# Altium PCB PCB2.PcbDoc
Units mil, origin at the board's own origin, x right, y up, seen from the top; angles counter-clockwise.
Board outline 2930 x 1820 mil, 2 copper layers (Top Layer, Bottom Layer), stack 61.756 mil thick; 17 components, 22 nets, 100 pads, 37 vias.
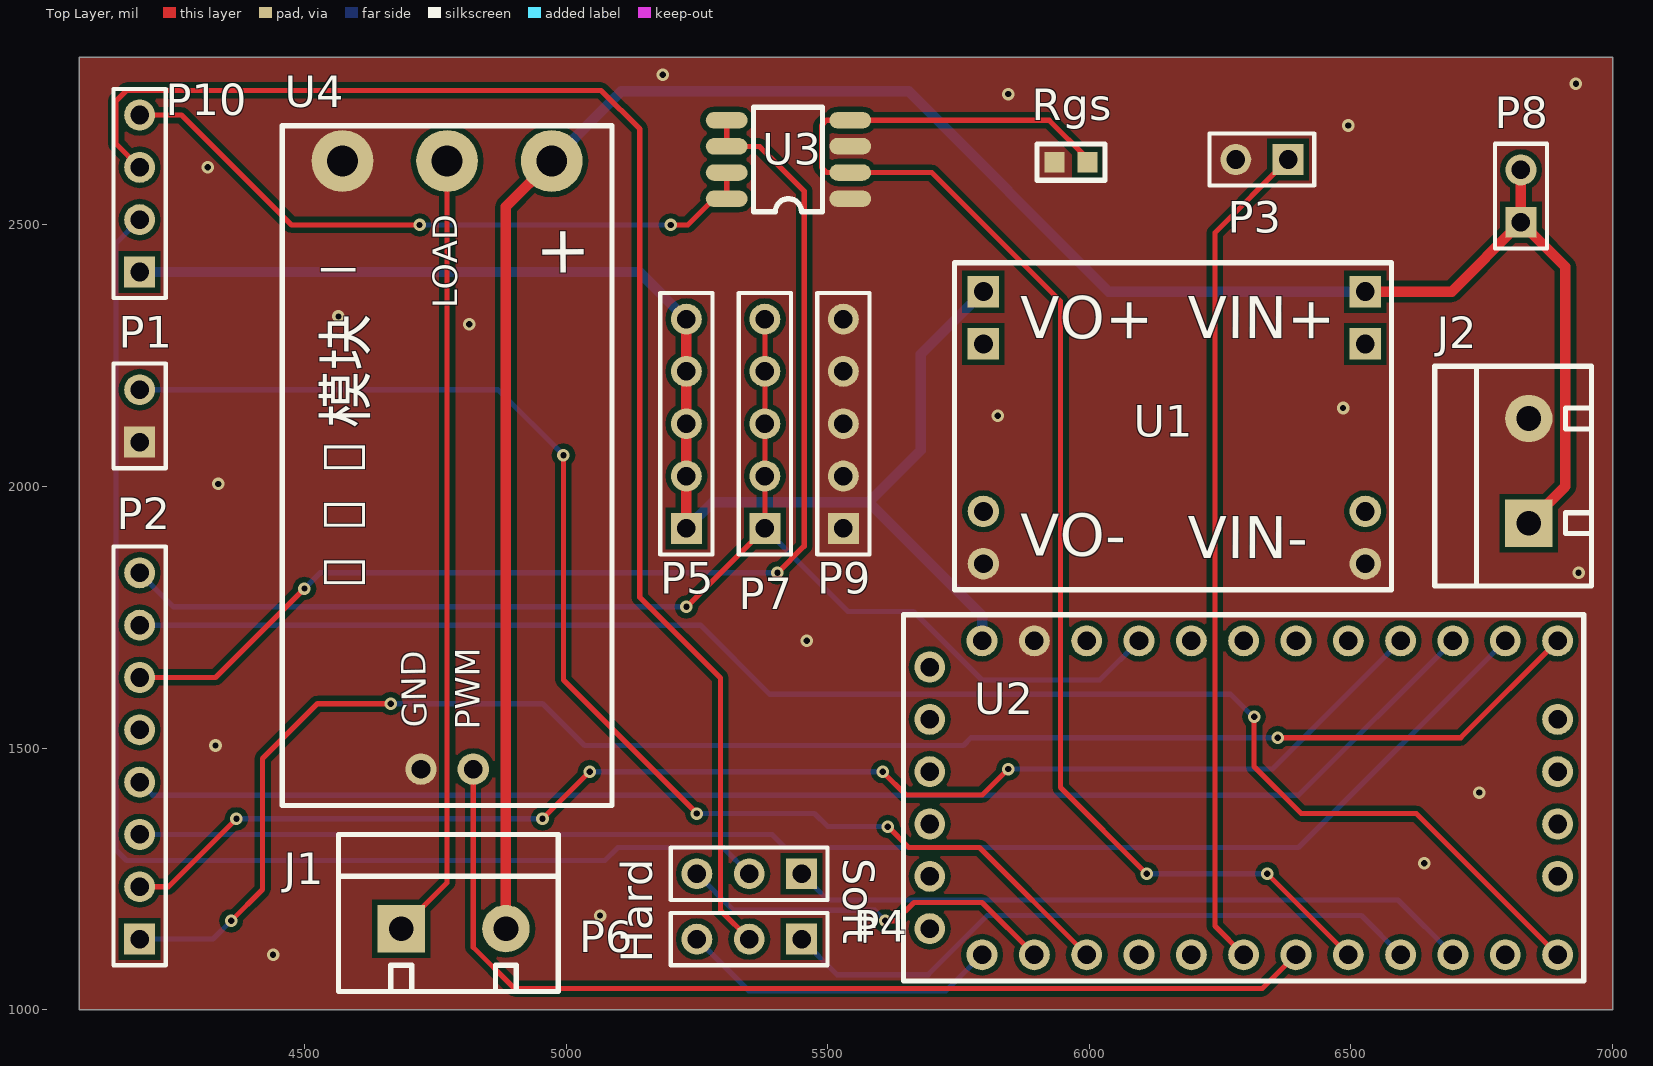
[diagram p0: Top Layer view]
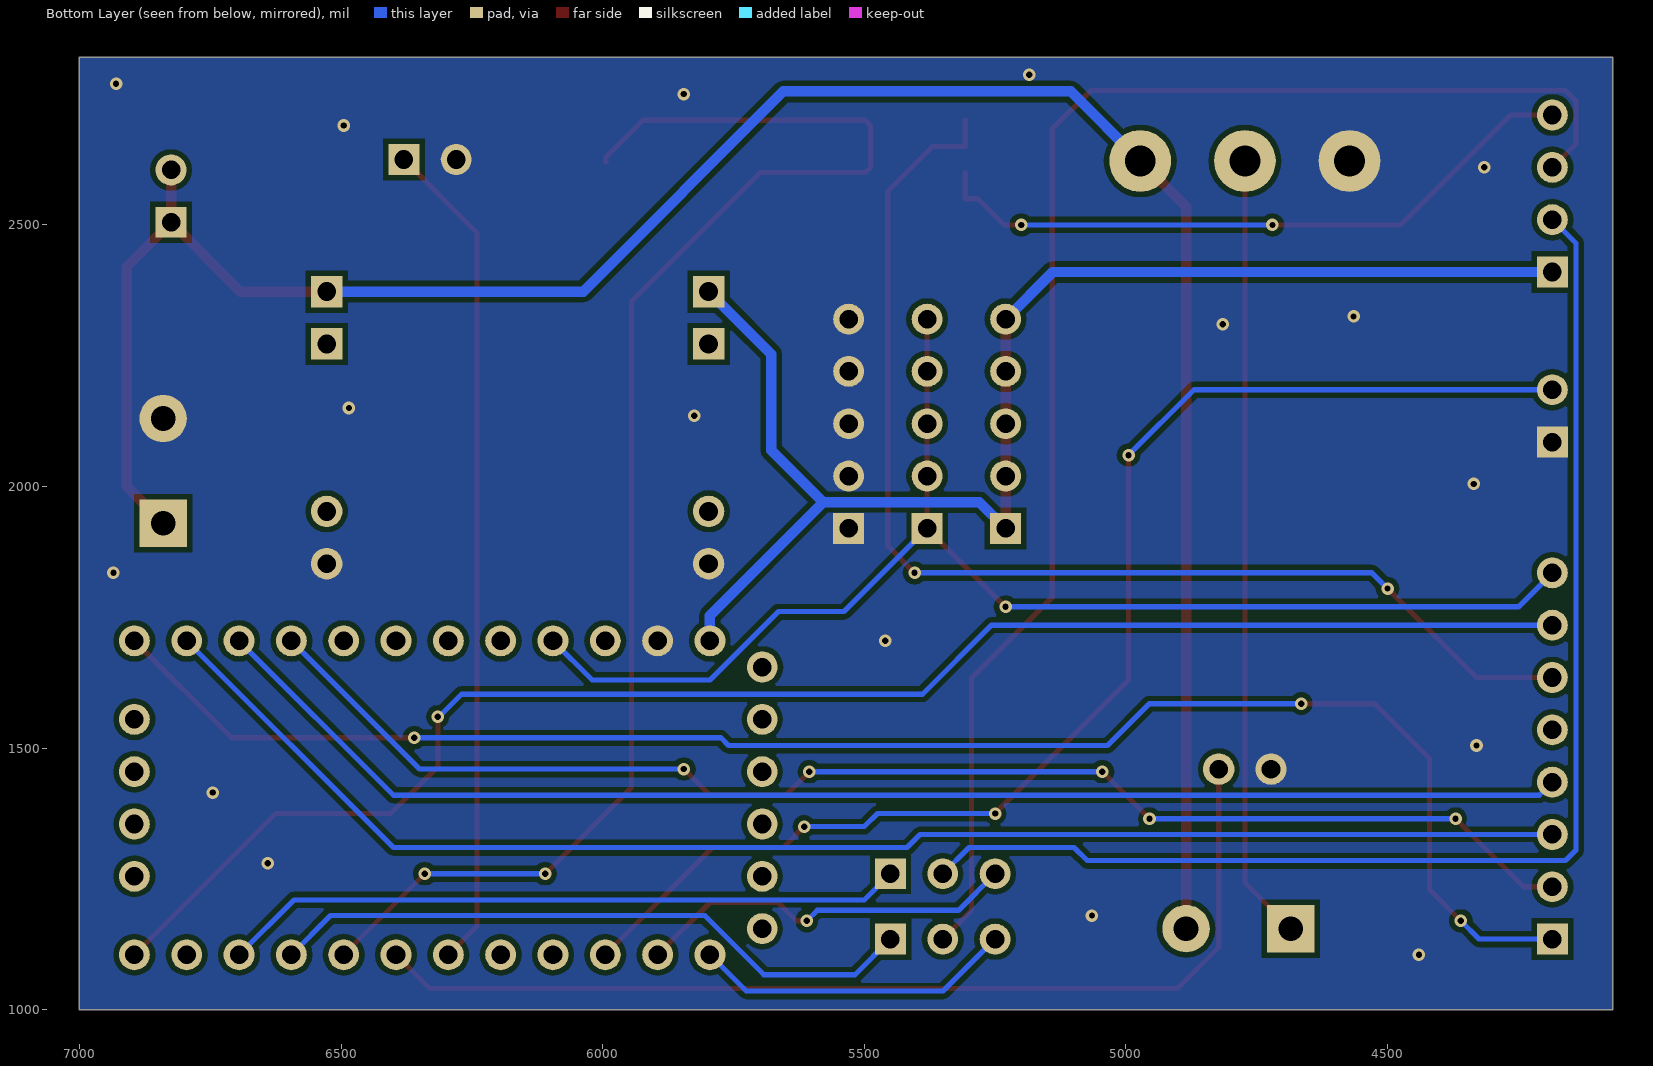
[diagram p1: Bottom Layer view, seen from below]

## Layer stack, top to bottom
Top Solder: solder mask 1, SM-001, Dk 4
Top Layer: signal copper 1.378
Dielectric 1: core 59, Core-043, Dk 4.3
Bottom Layer: signal copper 1.378
Bottom Solder: solder mask 1, SM-001, Dk 4

## Board outline
4070,1000 4070,2820 7000,2820 7000,1000

## Design rules (kind name [scope] priority, off if disabled: settings)
Clearance [All] p1: gap=10 ignorepadtopadclearanceinfootprint=FALSE
PolygonConnect [All] p1: connectstyle=Direct reliefconductorwidth=10 reliefentries=4 polygonreliefangle="90 Angle" airgapwidth=10
RoutingVias [All] p1: holewidth=12 width=24 viastyle="Through Hole" minholewidth=1 minwidth=12 maxholewidth=13 maxwidth=27
SolderMaskExpansion [All] p1: expansion=4 istentingtop=FALSE
Width Width_1 [(InNet('12v') OR InNet('5v') OR InNet('NetP9_1'))] p1: maxlimit=22 minlimit=15 preferedwidth=20 minimp=50.000000 maximp=50.000000 favimp=50.000000
Width [All] p2: maxlimit=10 minlimit=10 preferedwidth=10
30 further rules are at their usual default settings.

## Components (designator, comment, footprint, x,y, rotation, side; value= is the part's Value field where it differs from the comment)
J1 "" KF301-5.0-2P 4775,1185 r0 top
J2 "" KF301-5.0-2P 6810,2020 r90 top
P1 "reset" HDR1X2 4185,2085 r90 top
P2 "Header RFID" HDR1X8 4185,1135 r90 top
P3 "open button" HDR1X2 6380,2625 r180 top
P4 "Header TXQR" HDR1X3 5450,1135 r180 top
P5 "Header 5v" HDR1X5 5230,1920 r90 top
P6 "Header RXQR" HDR1X3 5450,1260 r180 top
P7 "Header 3v3" HDR1X5 5380,1920 r90 top
P8 "Header 12v" HDR1X2 6825,2505 r90 top
P9 "Header GND" HDR1X5 5530,1920 r90 top
P10 "Header QR" HDR1X4 4185,2410 r90 top
Rgs "RES" 0603 5965,2620 r0 top (schematic designator R1)
U1 "" MP1584EN_3A 6160,2115 r180 top
U2 "" ARDUINO-LGT8F-328D_AS_PRO_MINI-PRO-2 6295,1405 r90 top
U3 "" IC-MOS-9926A-SOP8 5425,2625 r180 top
U4 "" "PCBComponent_1 - duplicate" 4785,2040 r90 top

## Footprints (in the part's own frame and the unit in brackets; to place one, negate y for a bottom-side part, rotate by r counter-clockwise, add the part's x,y. Pads: shape width x height; smd on the part's side, far side on the other; paste and mask are expansions set on the pad)
0603 [mm] "SMD, 0603"
  rect 0.95x1 smd: 1(-0.8,0) 2(0.8,0)
  silkscreen extent -1.66,-0.88 1.66,0.88, body extent -0.77,-0.43 0.77,0.43, height 0.45
ARDUINO-LGT8F-328D_AS_PRO_MINI-PRO-2 [mm]
  round 1.5 hole 0.9: 1(-7.62,12.7) 2(-7.62,10.16) 3(-7.62,7.62) 4(-7.62,5.08) 5(-7.62,2.54) 6(-7.62,0) 7(-7.62,-2.54) 8(-7.62,-5.08) 9(-7.62,-7.62) 10(-7.62,-10.16) 11(-7.62,-12.7) 12(-7.62,-15.24) 13(7.62,-15.24) 14(7.62,-12.7) 15(7.62,-10.16) 16(7.62,-7.62) 17(7.62,-5.08) 18(7.62,-2.54) 19(7.62,0) 20(7.62,2.54) 21(7.62,5.08) 22(7.62,7.62) 23(7.62,10.16) 24(7.62,12.7) 25(6.35,15.24) 26(3.81,15.24) 27(1.27,15.24) 28(-1.27,15.24) 29(-3.81,15.24) 30(-6.35,15.24) 31(-3.81,-15.24) 32(-1.27,-15.24) 33(1.27,-15.24) 34(3.81,-15.24)
  silkscreen extent -8.89,-16.51 8.89,16.51
HDR1X2 [mm] "Connector; Header; 2 Position"
  rect 1.5x1.5 hole 0.9: 1(0,0)
  round 1.5 hole 0.9: 2(2.54,0)
  silkscreen extent -1.27,-1.27 3.81,1.27
HDR1X3 [mm] "Connector; Header; 3 Position"
  rect 1.5x1.5 hole 0.9: 1(0,0)
  round 1.5 hole 0.9: 2(2.54,0) 3(5.08,0)
  silkscreen extent -1.27,-1.27 6.35,1.27
HDR1X4 [mm] "Connector; Header; 4 Position"
  rect 1.5x1.5 hole 0.9: 1(0,0)
  round 1.5 hole 0.9: 2(2.54,0) 3(5.08,0) 4(7.62,0)
  silkscreen extent -1.27,-1.27 8.89,1.27
HDR1X5 [mm] "Connector; Header; 5 Position"
  rect 1.5x1.5 hole 0.9: 1(0,0)
  round 1.5 hole 0.9: 2(2.54,0) 3(5.08,0) 4(7.62,0) 5(10.16,0)
  silkscreen extent -1.27,-1.27 11.43,1.27
HDR1X8 [mm] "Connector; Header; 8 Position"
  rect 1.5x1.5 hole 0.9: 1(0,0)
  round 1.5 hole 0.9: 2(2.54,0) 3(5.08,0) 4(7.62,0) 5(10.16,0) 6(12.7,0) 7(15.24,0) 8(17.78,0)
  silkscreen extent -1.27,-1.27 19.05,1.27
IC-MOS-9926A-SOP8 [mm]
  oval 2.032x0.8 smd: D1(3,-0.635) D1(3,-1.905) D2(3,1.905) D2(3,0.635) G1(-3,-1.905) G2(-3,0.635) S1(-3,-0.645) S2(-3,1.905)
  silkscreen extent -1.65,-2.54 1.7,2.54
KF301-5.0-2P [mm]
  rect 2.3x2.3 hole 1.2: 1(-2.286,-0.762)
  round 2.3 hole 1.2: 2(2.794,-0.762)
  silkscreen extent -5.33,-3.81 5.33,3.81
MP1584EN_3A [mil]
  round 60 hole 36: 1(-367.5,262.5) 2(-367.5,162.5) 7(362.5,162.5) 8(362.5,262.5)
  rect 60x60 hole 36: 3(-367.5,-157.5) 4(-367.5,-257.5) 5(362.5,-257.5) 6(362.5,-157.5)
  silkscreen extent -418,-313 418,313
"PCBComponent_1 - duplicate" [mil]
  round 60 hole 36: 1(-580.23,-37.65) 2(-580.23,62.35)
  round 118.11 hole 59.06: 3(582.13,-187.65) 4(582.13,12.35) 5(582.13,212.35)
  silkscreen extent -650,-303 650,327

## Part data
J1 J2: library part KF301
P1 P3 P8: library part "Header 2", "Header, 2-Pin", LatestRevisionDate=17-Jul-2002, LatestRevisionNote="Re-released for DXP Platform.", Publisher="Altium Limited"
P2: library part "Header 8", "Header, 8-Pin", LatestRevisionDate=17-Jul-2002, LatestRevisionNote="Re-released for DXP Platform.", Publisher="Altium Limited"
P4 P6: library part "Header 3", "Header, 3-Pin", LatestRevisionDate=17-Jul-2002, LatestRevisionNote="Re-released for DXP Platform.", Publisher="Altium Limited"
P5 P7 P9: library part "Header 5", "Header, 5-Pin", LatestRevisionDate=17-Jul-2002, LatestRevisionNote="Re-released for DXP Platform.", Publisher="Altium Limited"
P10: library part "Header 4", "Header, 4-Pin", LatestRevisionDate=17-Jul-2002, LatestRevisionNote="Re-released for DXP Platform.", Publisher="Altium Limited"
Rgs: "Resistor"
U1: library part MP1584EN_3A
U2: library part ARDUINO-PRO-MINI
U3: library part IC-9926A
U4: library part 光耦隔离MOSFET模块

## Via types
v1: diameter 24, hole 12, Top Layer to Bottom Layer, 37 vias

## Nets (pads, with @x,y where several pads share a name; then routed paths per layer and width w, separated by ;. In a path a pad name is that pad's centre, name@x,y a point inside that pad or via, vN(x,y) a via of type N, cw(c..) or ccw(c..) an arc to the next point about the centre after c; other vN are vias at no path point)
3v3: P2.8 P7.1 P7.2 P7.3 P7.4 P7.5 U2.21 | length 2550.2
  Top Layer w10: v1(5230,1770) P7.1 P7.2 P7.3 P7.4 P7.5
  Bottom Layer w10: P2.8 4250,1770 v1(5230,1770) ; P7.1 5539,1761 5664,1761 5795,1630 6020,1630 U2.21
3v3sub: P2.6 U3.D1 | length 2286.3
  Top Layer w10: P2.6 4330,1635 v1(4500,1805) ; U3.D1@5306.89,2700 5306.89,2650 5370,2650 5455,2565 5455,1886 v1(5404,1835)
  Bottom Layer w10: v1(4500,1805) 4530,1835 v1(5404,1835)
5v: P5.1 P5.2 P5.3 P5.4 P5.5 P10.1 U1.5 U2.24 | length 2699.3
  Top Layer w20: P5.1 P5.2 P5.3 P5.4 P5.5
  Bottom Layer w20: P10.1 5140,2410 P5.5 ; P5.1 5280,1970 5578.3,1970 ; U2.24 5795,1753.3 5578.3,1970 ; U1.5 5677.9,2252.9 5677.9,2069.6 5578.3,1970
5vsub: P10.4 U3.D2 | length 1279.6
  Top Layer w10: P10.4 4265,2710 4475,2500 v1(4720,2500) ; v1(5200,2500) 5232.64,2500 5282.64,2550 5306.89,2550 U3.D2@5306.89,2600
  Bottom Layer w10: v1(4720,2500) v1(5200,2500)
12v: J1.2 J2.1 P8.1 P8.2 U1.4 U4.3 | length 4363.3
  Top Layer w20: J1.2 4885,2534.48 U4.3 ; U1.4 6692.5,2372.5 P8.1 ; P8.2 P8.1 ; J2.1 6910,2000 6910,2420 P8.1
  Bottom Layer w20: U4.3 5105.52,2755 5655,2755 6037.5,2372.5 U1.4
GND: J2.2 P1.1 P3.2 P9.1 P9.2 P9.3 P9.4 P9.5 Rgs.1 U1.1 U1.8 U2.23 U3.S1 U3.S2 U4.2 U4.5
  other v1: 4440,1105 5065,1180 6640,1280 6745,1415 4330,1505 5460,1705 6935,1835 4335,2005 5825,2135 6485,2150 4815,2310 4565,2325 4315,2610 6495,2690 5845,2750 6930,2770 5185,2787
MISO: P2.4 U2.15 | length 2642.5
  Bottom Layer w10: P2.4 4210,1410 6400,1410 U2.15
MOSI: P2.3 U2.14 | length 2784
  Bottom Layer w10: P2.3 5393.43,1335 5418.43,1310 6400,1310 U2.14
NetJ1_1: J1.1 U4.4 | length 1503.4
  Top Layer w10: J1.1 4772.65,1242.65 U4.4
NetP1_2: P1.2 U2.3 | length 2509.2
  Top Layer w10: v1(4995,2060) 4995,1630 v1(5250,1375) ; v1(5615,1350) 5655,1310 5790,1310 U2.3
  Bottom Layer w10: P1.2 4870,2185 v1(4995,2060) ; v1(5250,1375) 5475,1375 5500,1350 v1(5615,1350)
NetP3_1: P3.1 U2.6 | length 1600.8
  Top Layer w10: U2.6 6240,1160 6240,2485 P3.1
open: U2.7 U4.1 | length 1972.2
  Top Layer w10: U4.1 4822.65,1119.35 4901.53,1040.47 6330.47,1040.47 U2.7
opsub: Rgs.2 U2.8 U3.G1 U3.G2 | length 2803.6
  Top Layer w10: Rgs.2@5994.37,2620 5994.37,2628.86 5923.23,2700 U3.G1 5498,2700 5488,2690 5488,2610 5498,2600 U3.G2 5699,2600 5945,2354 5945,1424.53 v1@6109.76,1259.76 ; v1(6340,1260) U2.8
  Bottom Layer w10: v1(6110,1260) v1(6340,1260)
RST: P2.7 U2.12 | length 3026.6
  Top Layer w10: v1(6315,1560) 6315,1465 6405,1375 6625,1375 U2.12
  Bottom Layer w10: P2.7 5257,1735 5389,1603 6270,1603 6313,1560 v1(6315,1560)
RXQR: P6.2 P10.2 | length 2473
  Bottom Layer w10: P10.2 4140,2465 4140,1305 4160,1285 5074,1285 5099,1310 5300,1310 P6.2
RXQR_H: P6.3 U2.2 | length 738.2
  Top Layer w10: v1(5610,1170) 5630,1170 5665,1205 5795,1205 U2.2
  Bottom Layer w10: P6.3 5320,1190 5590,1190 v1(5610,1170)
RXQR_S: P6.1 U2.10 | length 1309.2
  Bottom Layer w10: P6.1 5500,1210 6590,1210 U2.10
SCK: P2.2 U2.16 | length 2641.6
  Top Layer w10: P2.2 4240,1235 v1(4370,1365) ; v1(4955,1365) v1(5045,1455) ; v1(5605,1455) 5649.53,1410.47 5795.47,1410.47 v1(5845,1460)
  Bottom Layer w10: v1(4370,1365) v1(4955,1365) ; v1(5045,1455) v1(5605,1455) ; v1(5845,1460) 6350,1460 U2.16
SDA: P2.1 U2.13 | length 3158.8
  Top Layer w10: v1(4360,1170) 4420,1230 4420,1480 4525,1585 v1(4665,1585) ; v1(6360,1520) 6710,1520 U2.13
  Bottom Layer w10: P2.1 4325,1135 v1(4360,1170) ; v1(4665,1585) 4955,1585 5035,1505 5759.39,1505 5774.39,1520 v1(6360,1520)
TXQR: P4.2 P10.3 | length 2820.1
  Top Layer w10: P10.3 4140,2655 4140,2737 4160,2757 5067,2757 5141,2683 5141,1788 5295,1634 5295,1190 P4.2
TXQR_H: P4.3 U2.1 | length 614.9
  Bottom Layer w10: P4.3 5349.32,1035.68 5725.68,1035.68 U2.1
TXQR_S: P4.1 U2.9 | length 1251
  Bottom Layer w10: P4.1 5518,1067 5692,1067 5805,1180 6520,1180 U2.9
pads on no net: P2.5 U1.2 U1.3 U1.6 U1.7 U2.4 U2.5 U2.11 U2.17 U2.18 U2.19 U2.20 U2.22 U2.25 U2.26 U2.27 U2.28 U2.29 U2.30 U2.31 U2.32 U2.33 U2.34

## Polygon pours and split planes (outlines as drawn)
GND on Bottom Layer "NONET_L02_P-001" (solid, pour order 0): 4070,2820 7000,2820 7000,1000 4070,1000
GND on Top Layer "NONET_L02_P-001" (solid, pour order 1): 4070,2820 7000,2820 7000,1000 4070,1000

## Silkscreen, mask and mechanical layers (free items; w line width, h text height)
Top Overlay:
  text "Soft" at 5530,1290 h60 r270
  text "Hard" at 5165,1090 h60 r90
Mechanical 1:
  the board outline again, w10

## Text inside footprints (layer, text, board x,y; h text height)
U1: Top Overlay "VO-" at 5868.02,1867.98 h80 r359.88; Top Overlay "VO+" at 5868.02,2282.98 h80 r359.85; Top Overlay "VIN+" at 6188.01,2282.99 h80 r359.91; Top Overlay "VIN-" at 6188.01,1862.99 h80 r359.92
U4: Top Overlay "GND" at 4749.15,1539.99 h80 r91; Top Overlay "PWM" at 4850,1535 h80 r90; Top Overlay "-" at 4610,2535.61 h314.96 r180; Top Overlay "LOAD" at 4806.95,2340.39 h80 r90; Top Overlay "+" at 4923.67,2499.88 h157.48 r270.43; Top Overlay "MOS模块" at 4642.69,1780.39 h137.79 r90